# Altium PCB xIMU_527.PcbDoc
Units mm, origin at the board's own origin, x right, y up, seen from the top; angles counter-clockwise.
Board outline 20.32 x 12.7 mm, 2 copper layers (Top Layer, Bottom Layer); 20 components, 9 nets, 72 pads, 29 vias.
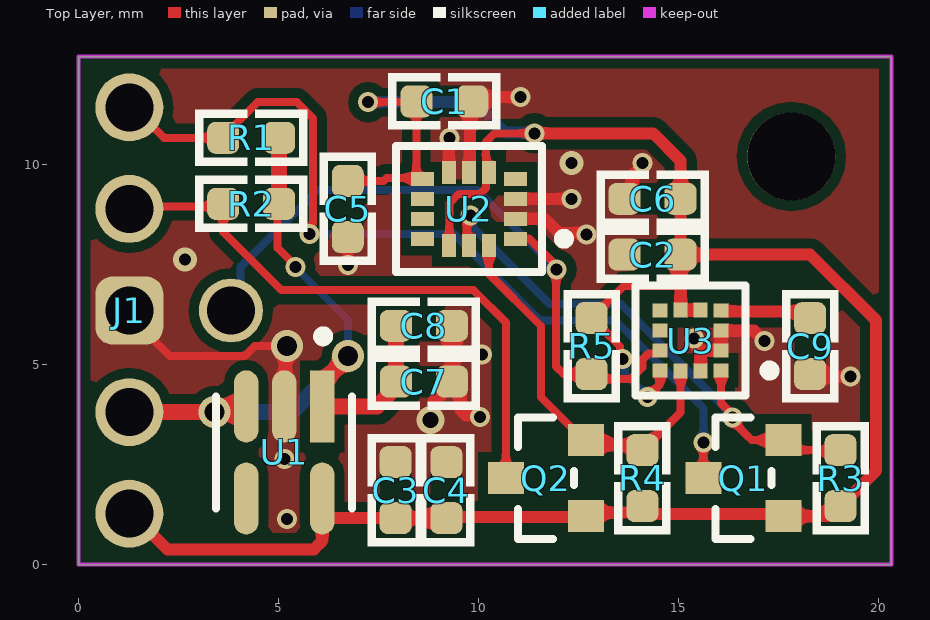
[diagram p0: Top Layer view]
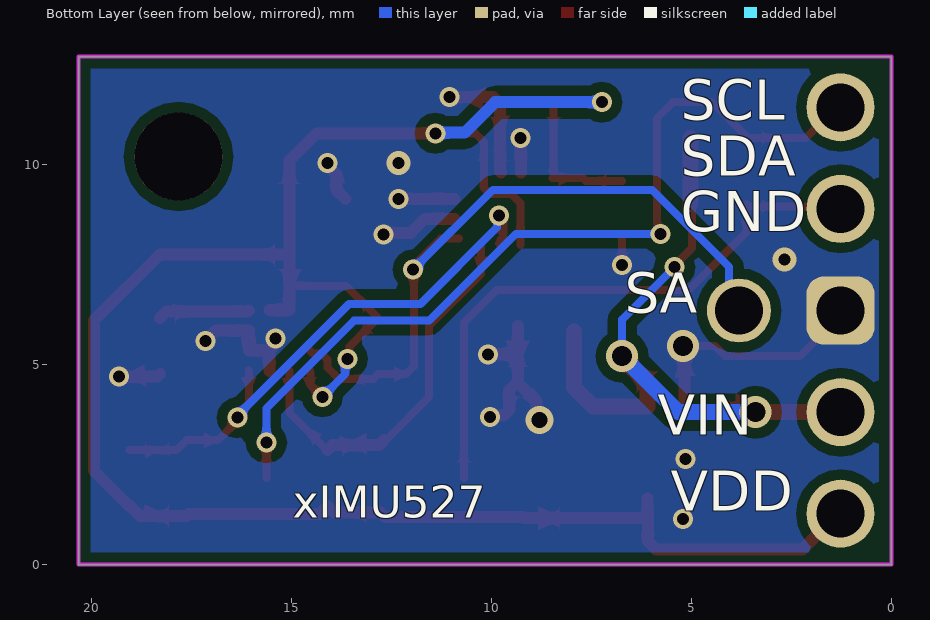
[diagram p1: Bottom Layer view, seen from below]
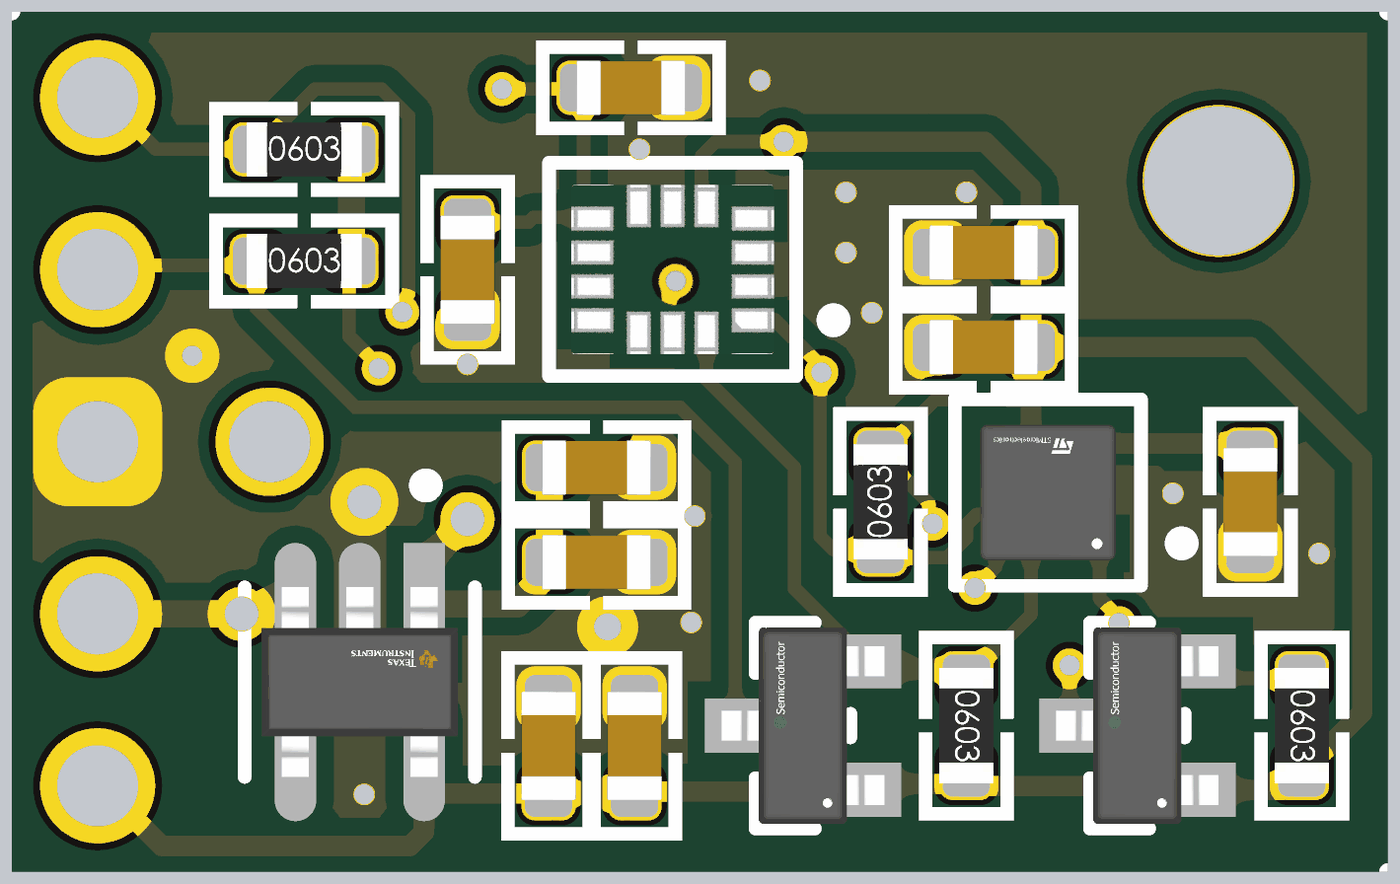
[diagram p2: 3D render of the assembled board from above, using the file's embedded part models]

## Layer stack, top to bottom
Top Solder: solder mask 0.0102, Solder Resist, Dk 3.5
Top Layer: signal copper 0.0356
Dielectric 1: dielectric 0.32, FR-4, Dk 4.8
Bottom Layer: signal copper 0.0356
Bottom Solder: solder mask 0.0102, Solder Resist, Dk 3.5

## Board outline
0,0 0,12.7 20.32,12.7 20.32,0

## Design rules (kind name [scope] priority, off if disabled: settings)
Clearance POLY [InPoly] p1: gap=0.254 ignorepadtopadclearanceinfootprint=FALSE
Clearance [All] p2: gap=0.15 ignorepadtopadclearanceinfootprint=FALSE
HoleSize [All] p1: absolutevalues=TRUE maxlimit=4 minlimit=0.025 maxpercent=80.000 minpercent=20.000
MinimumSolderMaskSliver [All] p1: minsoldermaskwidth=0.1
PolygonConnect [All] p1: connectstyle=Direct reliefconductorwidth=0.254 reliefentries=4 polygonreliefangle="90 Angle" airgapwidth=0.254
RoutingVias [All] p1: holewidth=0.3 width=0.5 viastyle="Through Hole" minholewidth=0.3 minwidth=0.5 maxholewidth=3 maxwidth=3
SilkToSilkClearance [All] p1: silktosilkclearance=0.1
SilkToSolderMaskClearance [IsPad] p1: minsilkscreentomaskgap=0 clearancetoexposedcopper=TRUE
SolderMaskExpansion [All] p1: expansion=0.102 istentingtop=FALSE
SupplyNets "Schematic Supply Nets_2" [InNet('GND')] p1: voltage=0.000
SupplyNets "Schematic Supply Nets_1" [InNet('VIN')] p2: voltage=0.000
SupplyNets "Schematic Supply Nets" [InNet('CS')] p3: voltage=0.000
Width [All] p1: maxlimit=2 minlimit=0.15 preferedwidth=0.15
26 further rules are at their usual default settings.

## Components (designator, comment, footprint, x,y, rotation, side; value= is the part's Value field where it differs from the comment)
C1 "4.7uF" C0603 9.144,11.576 r0 top
C2 "4.7uF" C0603 14.351,7.747 r180 top
C3 "1uF" C0603 7.928,1.859 r90 top
C4 "0.1uF" C0603 9.198,1.859 r270 top
C5 "0.1uF" C0603 6.731,8.89 r90 top
C6 "0.1uF" C0603 14.351,9.144 r0 top
C7 "1uF" C0603 8.636,4.572 r0 top
C8 "0.1uF" C0603 8.636,5.969 r180 top
C9 "0.1uF" C0603 18.288,5.461 r90 top
J1 "HDR1X5" xcon_5p 1.27,6.35 r0 top value=HDRM5
Q1 "BSS138" FP-318-08-MFG 16.621,2.159 r180 top
Q2 "BSS138" FP-318-08-MFG 11.684,2.159 r180 top
R1 "10K" R0603 4.318,10.668 r0 top
R2 "10K" R0603 4.318,9.017 r0 top
R3 "10K" R0603 19.05,2.159 r270 top
R4 "10K" R0603 14.097,2.159 r270 top
R5 "10K" R0603 12.827,5.461 r90 top
U1 "TPS7A2033PDBVR" FP-DBV0005A-IPC_A 5.141,2.801 r270 top
U2 "LSM6DSOXTR" FP-LGA-14L-DM00249496-MFG 9.76,8.894 r180 top
U3 "LIS3MDLTR" FP-VFLGA-12-8365767-MFG 15.3,5.6 r180 top

## Footprints (in the part's own frame and the unit in brackets; to place one, negate y for a bottom-side part, rotate by r counter-clockwise, add the part's x,y. Pads: shape width x height; smd on the part's side, far side on the other; paste and mask are expansions set on the pad)
C0603 [mm] "CHIP Capacitor, 1.6X0.8mm, 0603 OPTIMIZED"
  rrect50% 0.8x0.8 smd paste-5 mask+0.075: 1(-0.7,0) 2(0.7,0)
  Top Layer pour cut-out: -0.5,0.4 0.5,0.4 0.5,-0.4 -0.5,-0.4
  silkscreen extent -1.4,-0.7 1.4,0.7, body extent -0.8,-0.4 0.8,0.4, height 0.9
FP-318-08-MFG [mm]
  rect 0.9x0.8 smd paste+0 mask+0: 1(-1,0.95) 2(-1,-0.95) 3(1,0)
  silkscreen extent -0.7,-1.52 0.7,1.52, body extent -1.55,-1.62 1.55,1.62, height 0.25
FP-DBV0005A-IPC_A [mm]
  rect 1.805x0.612 smd paste+0 mask+0: 1(-1.15,0.95)
  rrect100% 1.805x0.612 smd paste+0 mask+0: 2(-1.15,0) 3(-1.15,-0.95) 4(1.15,-0.95) 5(1.15,0.95)
  silkscreen extent -3.03,-1.7 1.4,1.7, body extent -2.55,-1.95 2.55,1.95, height 0.25
FP-LGA-14L-DM00249496-MFG [mm]
  rect 0.575x0.35 smd paste+0 mask+0: 1(-1.162,0.75) 2(-1.162,0.25) 3(-1.162,-0.25) 4(-1.162,-0.75) 8(1.162,-0.75) 9(1.162,-0.25) 10(1.162,0.25) 11(1.162,0.75)
  rect 0.35x0.575 smd paste+0 mask+0: 5(-0.5,-0.913) 6(0,-0.913) 7(0.5,-0.913) 12(0.5,0.913) 13(0,0.913) 14(-0.5,0.913)
  silkscreen extent -2.5,-1.58 1.83,1.58, body extent -2.05,-1.8 2.05,1.8, height 0.25
FP-VFLGA-12-8365767-MFG [mm]
  rect 0.375x0.35 smd paste+0 mask+0: 1(-0.763,0.75) 2(-0.763,0.25) 3(-0.763,-0.25) 4(-0.763,-0.75) 7(0.763,-0.75) 8(0.763,-0.25) 9(0.763,0.25) 10(0.763,0.75)
  rect 0.35x0.375 smd paste+0 mask+0: 5(-0.25,-0.763) 6(0.25,-0.763) 11(0.25,0.763) 12(-0.25,0.763)
  silkscreen extent -2.1,-1.38 1.38,1.38, body extent -1.58,-1.58 1.58,1.58, height 0.25
R0603 [mm] "CHIP Resistor 1/10 WATT, 1.6x0.8mm, 0603, OPTIMIZED"
  rrect50% 0.8x0.8 smd paste-5 mask+0.075: 1(-0.7,0) 2(0.7,0)
  Top Layer pour cut-out: -0.5,0.4 0.5,0.4 0.5,-0.4 -0.5,-0.4
  silkscreen extent -1.4,-0.7 1.4,0.7, body extent -0.85,-0.4 0.85,0.4, height 0.56
xcon_5p [mm]
  round 1.7 hole 1.2: 1(0,5.08) 2(0,2.54) 4(0,-2.54) 5(0,-5.08)
  rrect50% 1.7x1.7 hole 1.2: 3(0,0)

## Part data
C1 C2: library part CAP_SMD_MLCC_0603, "CAP, MLCC, 4.7uF, 16V, 0603, 5%, X7R", Supplier Part Number 1=2006547, ASSEMBLY=ASSEMBLY, MANF=-, MANF_P#=MANF_PART#, PARAM="-, -%", PARAM2=-V, PRICE="100= 1$", Supplier 1=Rs
C3 C7: library part CAP_SMD_MLCC_0603, "CAP, MLCC, 1uF, 16V, 0603, 5%, X7R", Supplier Part Number 1=311-1446-1-ND, ASSEMBLY=ASSEMBLY, MANF=-, MANF_P#=MANF_PART#, PARAM="-, -%", PARAM2=-V, PRICE="100= 1$", Supplier 1=Digikey
C4 C5 C6 C8 C9: library part CAP_SMD_MLCC_0603, "CAP, MLCC, 0.1uF, 16V, 0603, 5%", Supplier Part Number 1=311-1088-1-ND, ASSEMBLY=ASSEMBLY, MANF=-, MANF_P#=MANF_PART#, PARAM="-, -%", PARAM2=-V, PRICE="100= 1$", Supplier 1=DigiKey
J1: library part HDR_M_1X5, "CONN, HEADER, Male, pitch: 2.54mm, 5POS"
Q1 Q2: library part CMP-07173-000101-1, "MOSFET N-CH 50V 220MA SOT-23", Case/Package=SOT-23, Continuous Drain Current (ID)=220mA, Drain to Source Breakdown Voltage=50V, Drain to Source Resistance=3.5R, Gate to Source Voltage (Vgs)=20V, Input Capacitance=27pF, Max Operating Temperature=150°C, Max Power Dissipation=360mW, Min Operating Temperature=-55°C, On-State Resistance=6R, Package Quantity=1, Threshold Voltage=1.3V, Contact Plating=Tin, Current Rating=220mA, Drain to Source Voltage (Vdss)=50V, Dual Supply Voltage=50V, Element Configuration=Single, Fall Time=9ns, Height=0.93mm, Lead Free="Lead Free", Length=2.92mm, Mount="Surface Mount", Nominal Vgs=1.3V, Number of Elements=1, Number of Pins=3, Packaging="Tape and Reel", Power Dissipation=360mW, Radiation Hardening=No, Rds On Max=3.5R, REACH SVHC="No SVHC", Rise Time=9ns, Termination=SMD/SMT, Turn-Off Delay Time=20ns, Turn-On Delay Time=2.5ns, Voltage Rating (DC)=50V, Weight=0.03g, Width=1.3mm
R1 R2 R3 R4 R5: library part RES_SMD_0603, "RESISTOR, SMD, 10K, 0603, 5%", Supplier Part Number 1=311-10KLEDKR-ND, ASSEMBLY=ASSEMBLY, DESC=DESCRIPTION, DIST#=MOUSER, MANF=-, MANF_P#=-, PARAM="1%, 0.1W", PARAM2=-, PRICE=-, Supplier 1=Digikey
U1: library part CMP-04917-000300-1, "IC REG LINEAR 3.3V 300MA SOT23-5", RoHS Compliant=Yes
U2: library part CMP-12177-000010-1, "INEMO INERTIAL MODULE: 3D ACCELE", Manufacturer=STMicroelectronics, Max Supply Voltage=3.6V, Min Supply Voltage=1.62V, Operating Supply Current=0.55mA, Package=LGA-14L-DM00249496, Temperature="-40°C to +85°C", Temperature Range High=+85°C, Temperature Range Low=-40°C, Accel Range=2/4/8/16g, Accel Sensitivity=0.061/0.122/0.244/0.488mV/g, Automotive=No, Category=IC, ComponentLink2Description=Datasheet, ComponentLink2URL=https://www.st.com/resource/en/datasheet/lsm6dsox.pdf, Device Class L1=Sensors, Device Class L2="Motion Sensors", Device Class L3="Inertial Measurement Units (IMUs)", Digikey Description="INEMO INERTIAL MODULE: 3D ACCELE", Footprint Url=https://www.st.com/content/ccc/resource/technical/document/technical_note/73/17/9c/16/dd/96/4a/01/CD00134799.pdf/files/CD00134799.pdf/jcr:content/translations/en.CD00134799.pdf, Gyro Range=125/250/500/1000/2000°/s, Gyro Sensitivity=4.375/8.75/17.5/35/70LSB/°/s, Height=0.86mm, Lead Free=Yes, Manufacturer Part Number=LSM6DSOXTR, Mouser Description="LSM6DSOX: 3.6 V 3 Axis Accelerometer Gyroscope iNEMO Inertial Module - LGA-14L", Octopart=https://octopart.com/lsm6dsoxtr-stmicroelectronics-98102600, RoHS=TRUE, Sensor Output=I2C,SPI,Other, Sensor Type=Temperature,Accelerometer,Gyroscope
U3: library part CMP-2000-07463-2, "SENSOR MR I2C/SPI 12LGA", Manufacturer=STMicroelectronics, Max Supply Voltage=3.6V, Min Supply Voltage=1.71V, Operating Supply Current=40-270uA, Package=VFLGA-12-8365767, Temperature="-40°C to +85°C", Temperature Range High=+85°C, Temperature Range Low=-40°C, Automotive=No, Category=IC, ComponentLink2Description=Datasheet, ComponentLink2URL=https://www.st.com/resource/en/datasheet/lis3mdl.pdf, Device Class L1=Sensors, Device Class L2="Magnetic Sensors", Device Class L3=unset, Digikey Description="SENSOR MR I2C/SPI 12LGA", Footprint Url=https://www.st.com/content/ccc/resource/technical/document/technical_note/73/17/9c/16/dd/96/4a/01/CD00134799.pdf/files/CD00134799.pdf/jcr:content/translations/en.CD00134799.pdf, Height=1mm, Lead Free=Yes, Manufacturer Part Number=LIS3MDLTR, Mouser Description="Board Mount Hall Effect / Magnetic Sensors Ultra Lo-Pwr Hi Perf 3-Axis 1.9-3.6V", Octopart=https://octopart.com/lis3mdltr-stmicroelectronics-29403125, RoHS=TRUE, Sensing Method=Magnetic, Sensor Output=I2C,SPI

## Free pads (board coordinates)
  round 2.2 hole 2.2: 2(17.82,10.2)
  round 1.6 hole 1.2: ""(3.81,6.35)

## Via types
v1: diameter 0.5, hole 0.3, Top Layer to Bottom Layer, tented both sides, 13 vias
v2: diameter 0.5, hole 0.3, Top Layer to Bottom Layer, 10 vias
v3: diameter 0.8, hole 0.5, Top Layer to Bottom Layer, 3 vias
v4: diameter 0.6, hole 0.3, Top Layer to Bottom Layer, tented both sides, 1 vias
v5: diameter 0.7, hole 0.4, Top Layer to Bottom Layer, 1 vias
v6: diameter 0.6, hole 0.3, Top Layer to Bottom Layer, 1 vias

## Nets (pads, with @x,y where several pads share a name; then routed paths per layer and width w, separated by ;. In a path a pad name is that pad's centre, name@x,y a point inside that pad or via, vN(x,y) a via of type N, cw(c..) or ccw(c..) an arc to the next point about the centre after c; other vN are vias at no path point)
CS: C1.1 C2.1 C3.1 C4.2 C5.2 C6.2 J1.5 Q1.1 Q2.1 R3.2 R4.2 R5.2 U1.5 U2.5 U2.8 U2.12 U3.5 U3.6 U3.10 | length 59.1
  Top Layer w0.2: C5.2 7.631,9.59 7.704,9.663 8.47,9.663 8.444,9.688 C1.1 8.425,11.557 v2(7.239,11.557) ; U2.12@9.271,7.989 9.271,9.033 9.507,9.269 10.038,9.269 10.185,9.415 10.185,10.566 10.399,10.78 v2(11.399,10.78) ; v2(13.6,5.139) 13.543,5.196 13.543,5.445 R5.2 13.634,6.968 15.051,6.968 C2.1 ; v2(14.224,4.191) 14.525,4.492 14.525,4.775 14.537,4.787 U3.10
  Top Layer w0.3: J1.5 1.33,1.27 2.219,0.381 5.883,0.381 6.089,0.587 U1.5@6.089,1.303 ; U1.5 6.091,1.303 6.235,1.159 C3.1 C4.2 9.223,1.184 12.659,1.184 12.773,1.298 13.936,1.298 R4.2 14.291,1.265 17.565,1.265 Q1.1 18.773,1.209 19.023,1.459 R3.2 19.939,2.348 19.939,6.099 18.291,7.747 C2.1 ; v2(11.399,10.78) 14.366,10.78 15.051,10.095 C6.2 U3.6 ; U3.6 U3.5
  Bottom Layer w0.2: v2(13.6,5.139) 13.658,5.081 13.658,4.757 v2(14.224,4.191)
  Bottom Layer w0.3: v2(7.239,11.557) 9.906,11.557 10.668,10.795 11.384,10.795 v2(11.399,10.78)
GND: C1.2 C2.2 C3.2 C4.1 C5.1 C6.1 C7.2 C8.1 C9.1 J1.3 U1.2 U2.2 U2.3 U2.6 U2.7 U3.2 U3.3 U3.12 | length 24
  Top Layer w0.2: J1.3 1.27,6.223 2.286,5.207 4.152,5.207 4.406,5.461 v3(5.207,5.461) ; v1(6.731,7.493) C5.1
  Top Layer w0.3: U1.2 5.174,3.985 5.174,5.428 v3(5.207,5.461) ; v5(8.799,3.617) 8.876,3.694 8.876,4.084 9.336,4.545 C7.2 ; U2.7 9.26,10.403 9.271,10.414 v1(9.271,10.668) ; C8.1 9.336,5.262 ; U2.6 9.784,9.831 9.784,11.516 C1.2 9.952,11.684 v1(11.049,11.684) ; v1(10.033,3.683) 9.995,3.721 9.693,3.721 9.555,3.859 9.555,4.353 C7.2 ; v1(10.087,5.252) 10.077,5.262 9.336,5.262 ; U2.2 11.659,8.644 12.01,8.293 12.662,8.293 v1(12.7,8.255) ; U2.3 v1(12.319,9.144) ; C6.1 13.87,9.363 13.87,9.752 14.097,9.979 v1(14.097,10.033) ; v1(15.392,5.655) 15.431,5.616 15.431,5.469 15.55,5.35 ; U3.12 15.55,5.35 ; v1(17.145,5.588) 16.883,5.85 U3.3 U3.2 15.55,5.35 ; C9.1 18.35,4.699 v1(19.304,4.699) ; C7.2 9.336,5.262
  other v1: 5.207,1.143 5.147,2.638
  other v4: 12.319,10.033
  other v6: 2.667,7.62
NetC9_2: C9.2 U3.4 | length 2.3
  Top Layer w0.3: U3.4 16.088,6.325 18.124,6.325 C9.2
SA0: pad. R5.1 U2.1 U3.9 | length 17.8
  Top Layer w0.2: U2.1@10.807,8.151 11.265,8.151 11.898,7.518 11.898,7.43 v2(11.956,7.372) 11.938,7.355 11.938,4.953 12.13,4.761 R5.1 12.949,4.639 13.807,4.639 14.1,4.931 14.1,5.129 14.246,5.275 14.462,5.275 U3.9
  Bottom Layer w0.2: pad. 4.052,6.592 4.052,7.435 5.984,9.367 9.961,9.367 v2(11.956,7.372)
SCL: J1.1 Q1.3 R1.1 | length 21.8
  Top Layer w0.2: J1.1 1.372,11.43 2.134,10.668 R1.1 3.618,10.697 4.478,11.557 5.461,11.557 5.862,11.156 5.862,8.531 5.826,8.496 5.826,8.322 v2(5.769,8.264) ; Q1.3 v2(15.621,3.048)
  Bottom Layer w0.2: v2(5.769,8.264) 9.389,8.264 11.557,6.096 13.431,6.096 15.621,3.906 v2(15.621,3.048)
SCL_LV: Q1.2 R3.1 U2.13 U3.1 | length 14.2
  Top Layer w0.2: U2.13@9.707,8.075 9.707,8.544 9.806,8.642 v2(9.806,8.723) ; U2.13 9.756,7.982 9.685,8.053 9.766,8.131 9.766,8.071 U2.13@9.806,8.031 ; U3.1 16.063,4.04 16.349,3.754 16.349,3.592 16.689,3.252 16.689,3.25 16.83,3.109 Q1.2 17.871,2.859 R3.1
  Bottom Layer w0.2: v2(9.806,8.723) 9.863,8.666 9.863,8.425 11.772,6.516 13.556,6.516 16.349,3.724 v2(16.349,3.673)
SDA: J1.2 Q2.3 R2.1 | length 15
  Top Layer w0.2: J1.2 1.333,8.954 3.554,8.954 R2.1 3.618,8.314 5.074,6.858 9.873,6.858 10.684,6.047 Q2.3
SDA_LV: Q2.2 R4.1 U2.14 U3.11 | length 9.8
  Top Layer w0.2: U2.14 10.259,7.267 11.557,5.969 11.557,4.186 12.634,3.109 Q2.2 ; R4.1@14.11,2.859 15.05,3.799 U3.11
  Top Layer w0.3: Q2.2 12.809,2.984 13.972,2.984 R4.1
VIN: C7.1 C8.2 J1.4 R1.2 R2.2 U1.1 U1.3 | length 18.1
  Top Layer w0.2: R2.2 4.98,8.979 4.98,7.912 5.419,7.473 v2(5.419,7.432)
  Top Layer w0.4: J1.4 v3@3.395,3.809 ; v3(3.396,3.808) 3.468,3.88 4.119,3.88 U1.3 ; R2.2 R1.2 ; v3(6.731,5.207) 6.731,5.189 6.091,4.549 U1.1 7.462,3.952 7.936,4.426 C8.2@7.936,5.823
  Bottom Layer w0.2: v2(5.419,7.432) 6.731,6.12 v3(6.731,5.207)
  Bottom Layer w0.4: v3(3.396,3.808) 5.332,3.808 v3(6.731,5.207)
pads on no net: U1.4 U2.4 U2.9 U2.10 U2.11 U3.7 U3.8

## Polygon pours and split planes (outlines as drawn)
GND on Top Layer "GND_L01_P000" (solid, remove dead copper, pour order 0): 0,0 0,12.7 20.32,12.7 20.32,0
GND on Bottom Layer "GND_L02_P001" (solid, remove dead copper, pour order 1): 0,0 0,12.7 20.32,12.7 20.32,0

## Keep-outs
Keep-Out Layer:
  the board outline again, w0.1

## Silkscreen, mask and mechanical layers (free items; w line width, h text height)
Bottom Overlay:
  text "SCL" at 5.261,11.122 h1
  text "SDA" at 5.261,9.725 h1
  text "GND" at 5.261,8.328 h1
  text "SA" at 6.658,6.296 h1
  text "VIN" at 5.836,3.248 h1
  text "VDD" at 5.515,1.343 h1
  text "xIMU527" at 14.963,1.166 h0.8

## Dimensions
20.32,12.7 to 20.32,0 on Top Overlay
0,12.7 to 20.32,12.7 on Top Overlay